# EAGLE board minimumSystem_Ilham Widyo Nugroho (SM) (EAGLE 7.3.0)
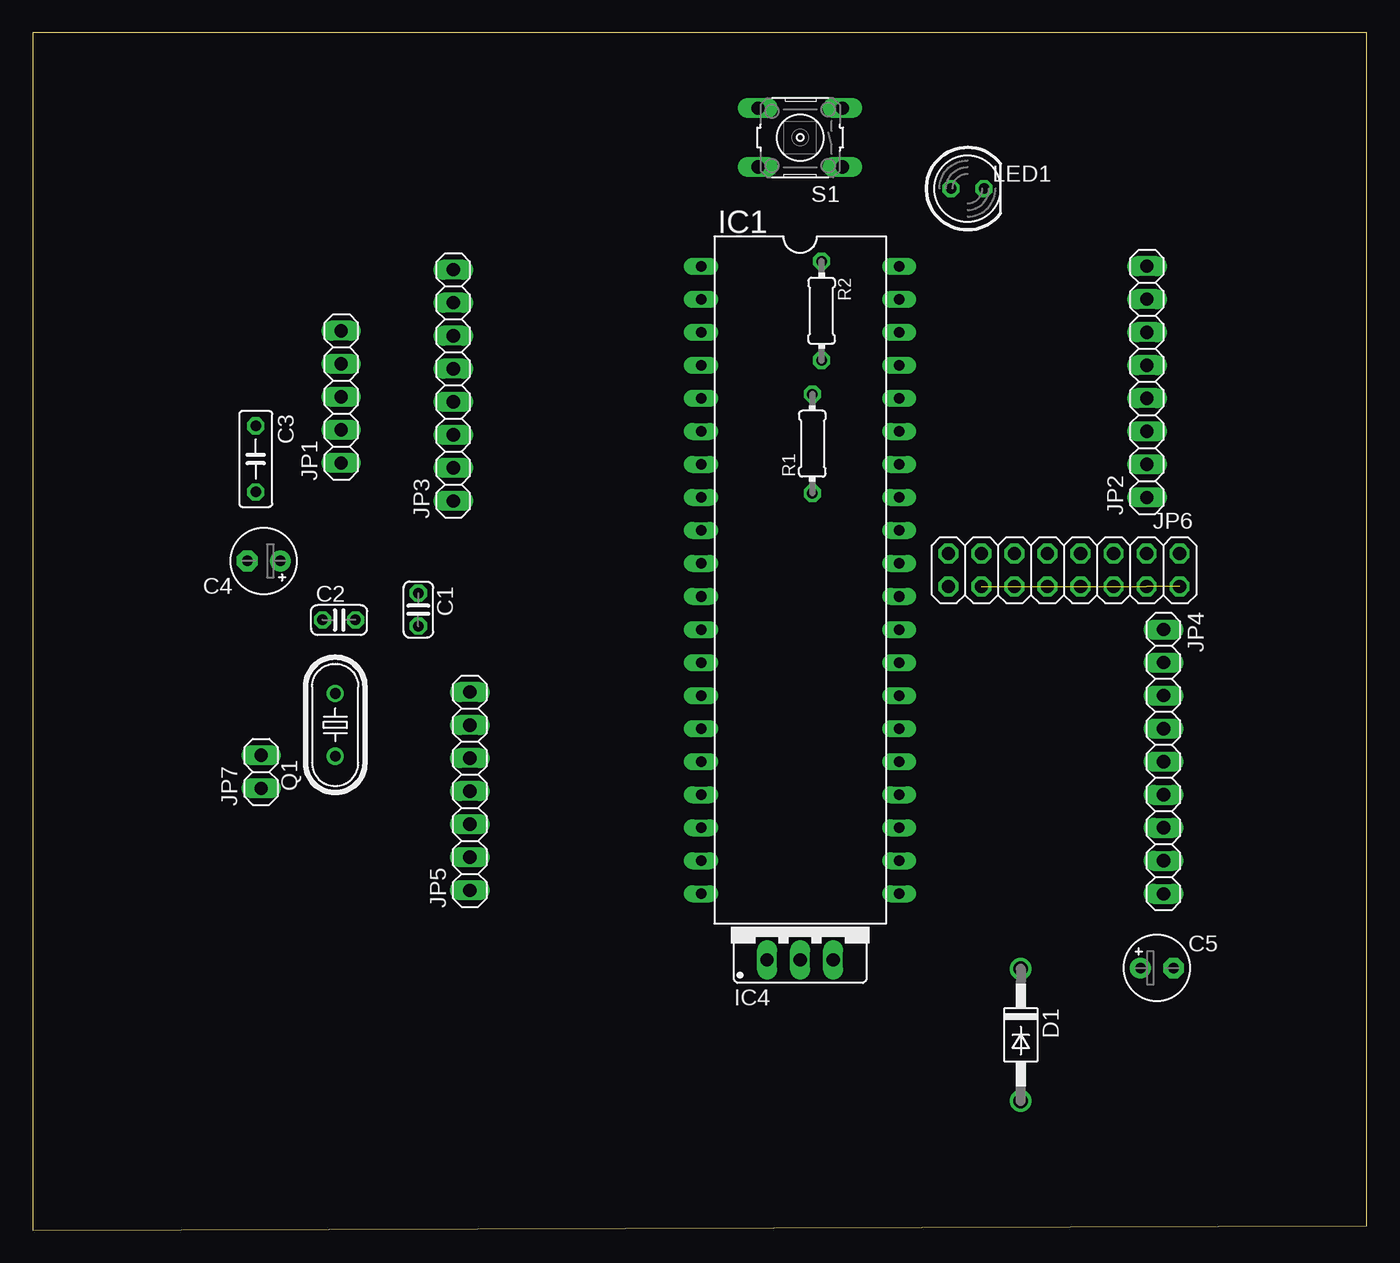
[diagram p0: board, top side]
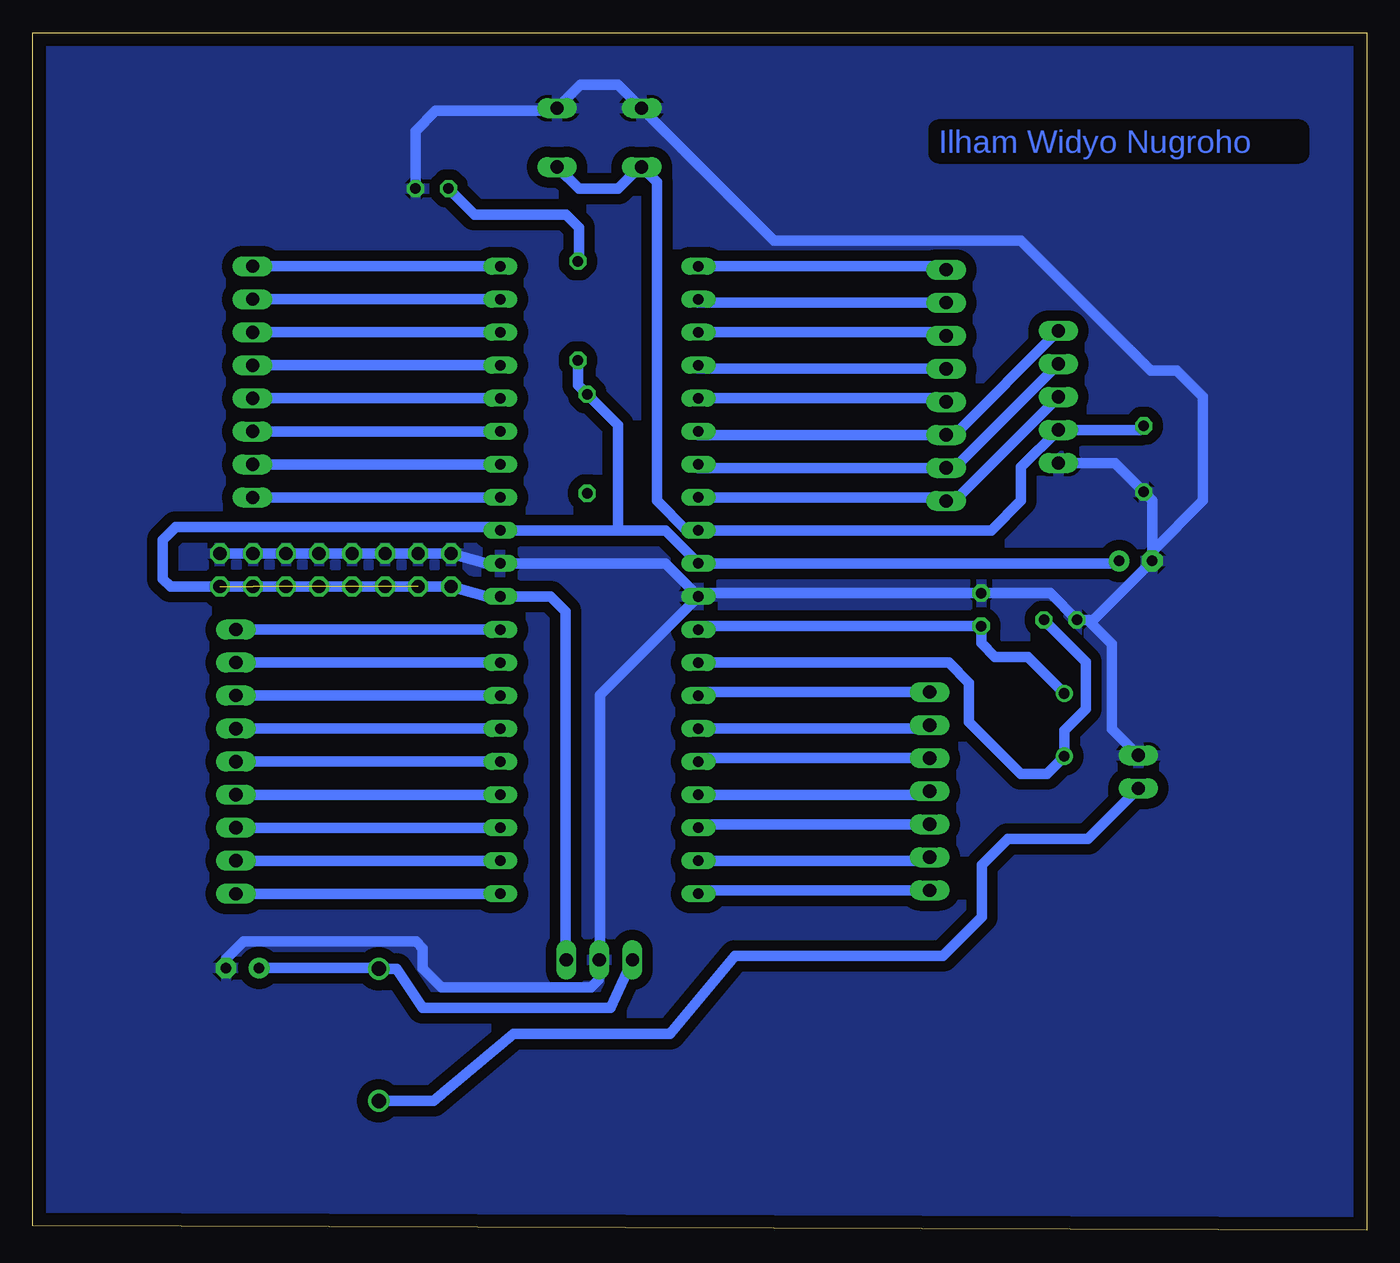
[diagram p1: board, bottom side, seen from below]

Size 102.62 x 92.12 mm. Coordinates in mm from the lower left corner, seen from the top.
Outline: 0,0 102.62,0.35 102.62,92.11 0,92.12 0,0
Copper layers (1*16): Top 0.035mm / dielectric 1.5mm / Bottom 0.035mm
Design rules "default": minimum track width 6mil, minimum drill 0.35mm, track to track 6mil, track to pad 6mil, pad to pad 6mil, via to via 6mil, smd to smd 6mil, copper to edge 40mil, drill to drill 6mil, minimum pad ring 10mil, minimum via ring 8mil, stop-mask expansion 4mil, vias tented up to drill 0mil, thermal gap 10mil

## Footprints (pad centres in the part's own frame; a part is rotated, then mirrored left to right if it is on the bottom)
C025-024X044 = drill 0.813 octagon: 1 -1.27,0; 2 1.27,0
C050-025X075 = drill 0.813 octagon: 1 -2.54,0; 2 2.54,0
E2,5-5 = drill 0.813 pad 1.6: + -1.27,0 | drill 0.813 pad 1.6 octagon: - 1.27,0
DO41-10 = drill 1.118: A 5.08,0; C -5.08,0
DIL40 = drill 0.813 long: 1 -24.13,-7.62; 2 -21.59,-7.62; 3 -19.05,-7.62; 4 -16.51,-7.62; 5 -13.97,-7.62; 6 -11.43,-7.62; 7 -8.89,-7.62; 8 -6.35,-7.62; 9 -3.81,-7.62; 10 -1.27,-7.62; 11 1.27,-7.62; 12 3.81,-7.62; 13 6.35,-7.62; 14 8.89,-7.62; 15 11.43,-7.62; 16 13.97,-7.62; 17 16.51,-7.62; 18 19.05,-7.62; 19 21.59,-7.62; 20 24.13,-7.62; 21 24.13,7.62; 22 21.59,7.62; 23 19.05,7.62; 24 16.51,7.62; 25 13.97,7.62; 26 11.43,7.62; 27 8.89,7.62; 28 6.35,7.62; 29 3.81,7.62; 30 1.27,7.62; 31 -1.27,7.62; 32 -3.81,7.62; 33 -6.35,7.62; 34 -8.89,7.62; 35 -11.43,7.62; 36 -13.97,7.62; 37 -16.51,7.62; 38 -19.05,7.62; 39 -21.59,7.62; 40 -24.13,7.62
78XXS = drill 1.016 long: GND 0,-2.54; IN -2.54,-2.54; OUT 2.54,-2.54
1X05 = drill 1.016 long: 1 -5.08,0; 2 -2.54,0; 3 0,0; 4 2.54,0; 5 5.08,0
1X08 = drill 1.016 long: 1 -8.89,0; 2 -6.35,0; 3 -3.81,0; 4 -1.27,0; 5 1.27,0; 6 3.81,0; 7 6.35,0; 8 8.89,0
1X09 = drill 1.016 long: 1 -10.16,0; 2 -7.62,0; 3 -5.08,0; 4 -2.54,0; 5 0,0; 6 2.54,0; 7 5.08,0; 8 7.62,0; 9 10.16,0
1X07 = drill 1.016 long: 1 -7.62,0; 2 -5.08,0; 3 -2.54,0; 4 0,0; 5 2.54,0; 6 5.08,0; 7 7.62,0
2X08 = drill 1.016 octagon: 1 -8.89,-1.27; 2 -8.89,1.27; 3 -6.35,-1.27; 4 -6.35,1.27; 5 -3.81,-1.27; 6 -3.81,1.27; 7 -1.27,-1.27; 8 -1.27,1.27; 9 1.27,-1.27; 10 1.27,1.27; 11 3.81,-1.27; 12 3.81,1.27; 13 6.35,-1.27; 14 6.35,1.27; 15 8.89,-1.27; 16 8.89,1.27
1X02 = drill 1.016 long: 1 -1.27,0; 2 1.27,0
LED5MM = drill 0.813 octagon: A -1.27,0; K 1.27,0
HC49U-V = drill 0.813: 1 -2.413,0; 2 2.413,0
0204/7 = drill 0.813 octagon: 1 -3.81,0; 2 3.81,0
B3F-10XX = drill 1.016 long: 1 -3.251,2.261; 2 3.251,2.261; 3 -3.251,-2.261; 4 3.251,-2.261

## Placement (x,y rotation side)
C1  [C025-024X044]  29.67,47.74 270 top
C2  [C025-024X044]  23.57,46.95 0 top
C3  [C050-025X075]  17.17,59.33 270 top
C4  [E2,5-5]  17.79,51.49 180 top
C5  [E2,5-5]  86.47,20.18 0 top
D1  1N4004  [DO41-10]  75.99,15.04 270 top
IC1  MEGA16-P  [DIL40]  59.03,50.02 270 top
IC4  [78XXS]  59.03,23.35 0 top
JP1  [1X05]  23.74,64.1 90 top
JP2  [1X08]  85.7,65.26 90 top
JP3  [1X08]  32.36,64.99 90 top
JP4  [1X09]  86.97,36.05 270 top
JP5  [1X07]  33.63,33.78 90 top
JP6  [2X08]  79.32,50.78 0 top
JP7  [1X02]  17.58,35.27 90 top
LED1  [LED5MM]  71.9,80.12 0 top
Q1  [HC49U-V]  23.28,38.88 90 top
R1  [0204/7]  59.97,60.5 90 top
R2  [0204/7]  60.68,70.72 270 top
S1  [B3F-10XX]  59.03,84.04 180 top

## Library data of the parts
C1 C2 C4 C5 R1 R2 = rcl
C3 = resistor
D1 = diode
IC1 = atmel; MPN: ATMEGA16-16PU; OC_FARNELL: 9171142; OC_NEWARK: 01M6885
IC4 = v-reg
JP1-JP7 = pinhead
LED1 = led
Q1 = crystal; OC_FARNELL: 1666969; OC_NEWARK: unknown
S1 = switch-omron; MPN: B3F-1000; OC_FARNELL: 176432; OC_NEWARK: 36M3542

## Nets
+5V: C4.+ IC1.10 IC1.30 IC1.32 IC4.OUT JP6.1 JP6.3 JP6.5 JP6.7 JP6.9 JP6.11 JP6.13 JP6.15 R1.2 R2.2
+12V: D1.A JP7.1
C0: IC1.22 JP4.8
C1: IC1.23 JP4.7
C2: IC1.24 JP4.6
C3: IC1.25 JP4.5
D7: IC1.14 JP5.7
GND: C1.1 C2.1 C3.2 C4.- C5.- IC1.11 IC1.31 IC4.GND JP1.1 JP6.2 JP6.4 JP6.6 JP6.8 JP6.10 JP6.12 JP6.14 JP6.16 JP7.2 LED1.K S1.3 S1.4
N$1: IC1.33 JP2.1
N$2: IC1.34 JP2.2
N$3: IC1.35 JP2.3
N$4: IC1.36 JP2.4
N$5: IC1.37 JP2.5
N$6: IC1.38 JP2.6
N$7: IC1.39 JP2.7
N$8: IC1.40 JP2.8
N$9: R1.1
N$11: IC1.29 JP4.1
N$12: IC1.28 JP4.2
N$13: IC1.27 JP4.3
N$14: IC1.5 JP3.4
N$15: IC1.20 JP5.1
N$16: IC1.19 JP5.2
N$19: IC1.26 JP4.4
N$20: IC1.6 JP1.5 JP3.3
N$21: IC1.4 JP3.5
N$22: IC1.3 JP3.6
N$23: IC1.2 JP3.7
N$24: IC1.1 JP3.8
N$25: C5.+ D1.C IC4.IN
N$30: IC1.15 JP5.6
N$31: IC1.16 JP5.5
N$32: IC1.17 JP5.4
N$33: C3.1 IC1.9 JP1.2 S1.1 S1.2
N$34: IC1.18 JP5.3
N$35: C1.2 IC1.12 Q1.2
N$36: C2.2 IC1.13 Q1.1
N$37: LED1.A R2.1
N$46: IC1.8 JP1.3 JP3.1
N$47: IC1.7 JP1.4 JP3.2
RS: IC1.21 JP4.9

## Tracks (layer width: path | path; a pad name or v marks a point on that pad's centre or on a via)
+5V  (6 unrouted)
  Bottom 0.813: C4.+ 19.26,51.29 IC1.10 53.95,53.83 57.61,53.83 | 57.61,53.83 IC1.32 66.93,54.11 91.61,54.11 92.61,53.11 92.61,50.11 92.01,49.51 JP6.15 JP6.1 66.89,48.51 IC1.30 62.77,48.75 61.63,47.61 61.63,20.87 IC4.OUT | 57.61,53.83 57.61,61.95 R1.2 60.68,65.02 R2.2
+12V
  Bottom 0.813: JP7.1 21.47,30.11 27.61,30.11 29.61,28.11 29.61,24.11 32.61,21.11 48.61,21.11 53.61,15.11 65.61,15.11 71.76,9.96 D1.A
C0
  Bottom 0.813: JP4.8 IC1.22
C1
  Bottom 0.813: IC1.23 JP4.7
C2
  Bottom 0.813: IC1.24 JP4.6
C3
  Bottom 0.813: IC1.25 JP4.5
D7
  Bottom 0.813: IC1.14 51.14,41.4 JP5.7
GND
  Bottom 0.813: JP1.1 19.4,59.02 C3.2 16.52,56.14 16.52,52.2 | 16.52,52.2 C4.- 21.06,46.95 21.45,46.95 | 21.45,46.95 C2.1 24.36,49.01 C1.1 51.15,49.01 IC1.11 | JP7.2 19.61,38.57 19.61,45.11 21.45,46.95 | 55.8,86.3 57.61,88.11 60.47,88.11 S1.3 62.47,86.11 71.61,86.11 73.17,84.55 LED1.K | 55.8,86.3 S1.4 | 55.8,86.3 45.61,76.11 26.61,76.11 16.61,66.11 14.61,66.11 12.61,64.11 12.61,56.11 16.52,52.2 | IC1.11 53.95,51.29 IC1.31 66.89,51.05 JP6.2 JP6.16 | IC4.GND 59.08,20.76 59.08,19.28 59.65,18.71 71.17,18.71 72.61,20.15 72.61,21.7 73.13,22.22 86.38,22.22 87.74,20.86 C5.- | IC1.11 58.96,41.19 58.96,21.38
  pour Bottom (isolate 0.813): -0.35,91.99 -0.35,-0.03 102.7,-0.03 102.7,92.1
N$1
  Bottom 0.813: JP2.1 IC1.33
N$2
  Bottom 0.813: IC1.34 JP2.2
N$3
  Bottom 0.813: JP2.3 IC1.35
N$4
  Bottom 0.813: IC1.36 JP2.4
N$5
  Bottom 0.813: JP2.5 IC1.37
N$6
  Bottom 0.813: IC1.38 JP2.6
N$7
  Bottom 0.813: JP2.7 IC1.39
N$8
  Bottom 0.813: IC1.40 JP2.8
N$11
  Bottom 0.813: IC1.29 JP4.1
N$12
  Bottom 0.813: IC1.28 JP4.2
N$13
  Bottom 0.813: IC1.27 JP4.3
N$14
  Bottom 0.813: IC1.5 32.36,63.99 JP3.4
N$15
  Bottom 0.813: IC1.20 51.14,26.16 JP5.1
N$16
  Bottom 0.813: JP5.2 33.9,28.43 IC1.19
N$19
  Bottom 0.813: IC1.26 JP4.4
N$20
  Bottom 0.813: IC1.6 51.41,61.18 JP3.3 31.74,61.18 JP1.5
N$21
  Bottom 0.813: JP3.5 51.41,66.26 IC1.4
N$22
  Bottom 0.813: IC1.3 32.36,69.07 JP3.6
N$23
  Bottom 0.813: JP3.7 51.41,71.34 IC1.2
N$24
  Bottom 0.813: IC1.1 32.36,74.15 JP3.8
N$25
  Bottom 0.813: IC4.IN 58.19,17.11 72.61,17.11 74.62,20.12 D1.C 76.05,20.18 C5.+
N$30
  Bottom 0.813: JP5.6 33.9,38.59 IC1.15
N$31
  Bottom 0.813: IC1.16 51.14,36.32 JP5.5
N$32
  Bottom 0.813: JP5.4 33.9,33.51 IC1.17
N$33
  Bottom 0.813: C3.1 17.48,61.56 JP1.2 26.61,58.69 26.61,56.11 28.89,53.83 IC1.9 52.33,53.83 54.61,56.11 54.61,80.61 S1.2 55.94,81.78 57.61,80.11 60.61,80.11 S1.1
N$34
  Bottom 0.813: IC1.18 51.14,31.24 JP5.3
N$35
  Bottom 0.813: Q1.2 26.09,44.11 28.61,44.11 29.67,45.17 C1.2 51.15,46.47 IC1.12
N$36
  Bottom 0.813: C2.2 21.61,43.72 21.61,40.11 23.28,38.44 Q1.1 24.63,35.11 26.61,35.11 30.61,39.11 30.61,42.11 32.17,43.67 IC1.13
N$37
  Bottom 0.813: R2.1 60.61,74.6 60.61,77.11 61.61,78.11 68.61,78.11 LED1.A
N$46
  Bottom 0.813: IC1.8 32.36,56.37 JP3.1 31.74,56.1 JP1.3
N$47
  Bottom 0.813: IC1.7 51.41,58.64 JP3.2 31.74,58.64 JP1.4
RS
  Bottom 0.813: IC1.21 JP4.9

## Text on the board
Bottom: Ilham Widyo Nugroho